# Altium PCB PCB_2-way_Traffic.PcbDoc
Units mil, origin at the board's own origin, x right, y up, seen from the top; angles counter-clockwise.
Board outline 2755.91 x 2244.09 mil, 2 copper layers (Top Layer, Bottom Layer); 24 components, 31 nets, 165 pads, 0 vias.
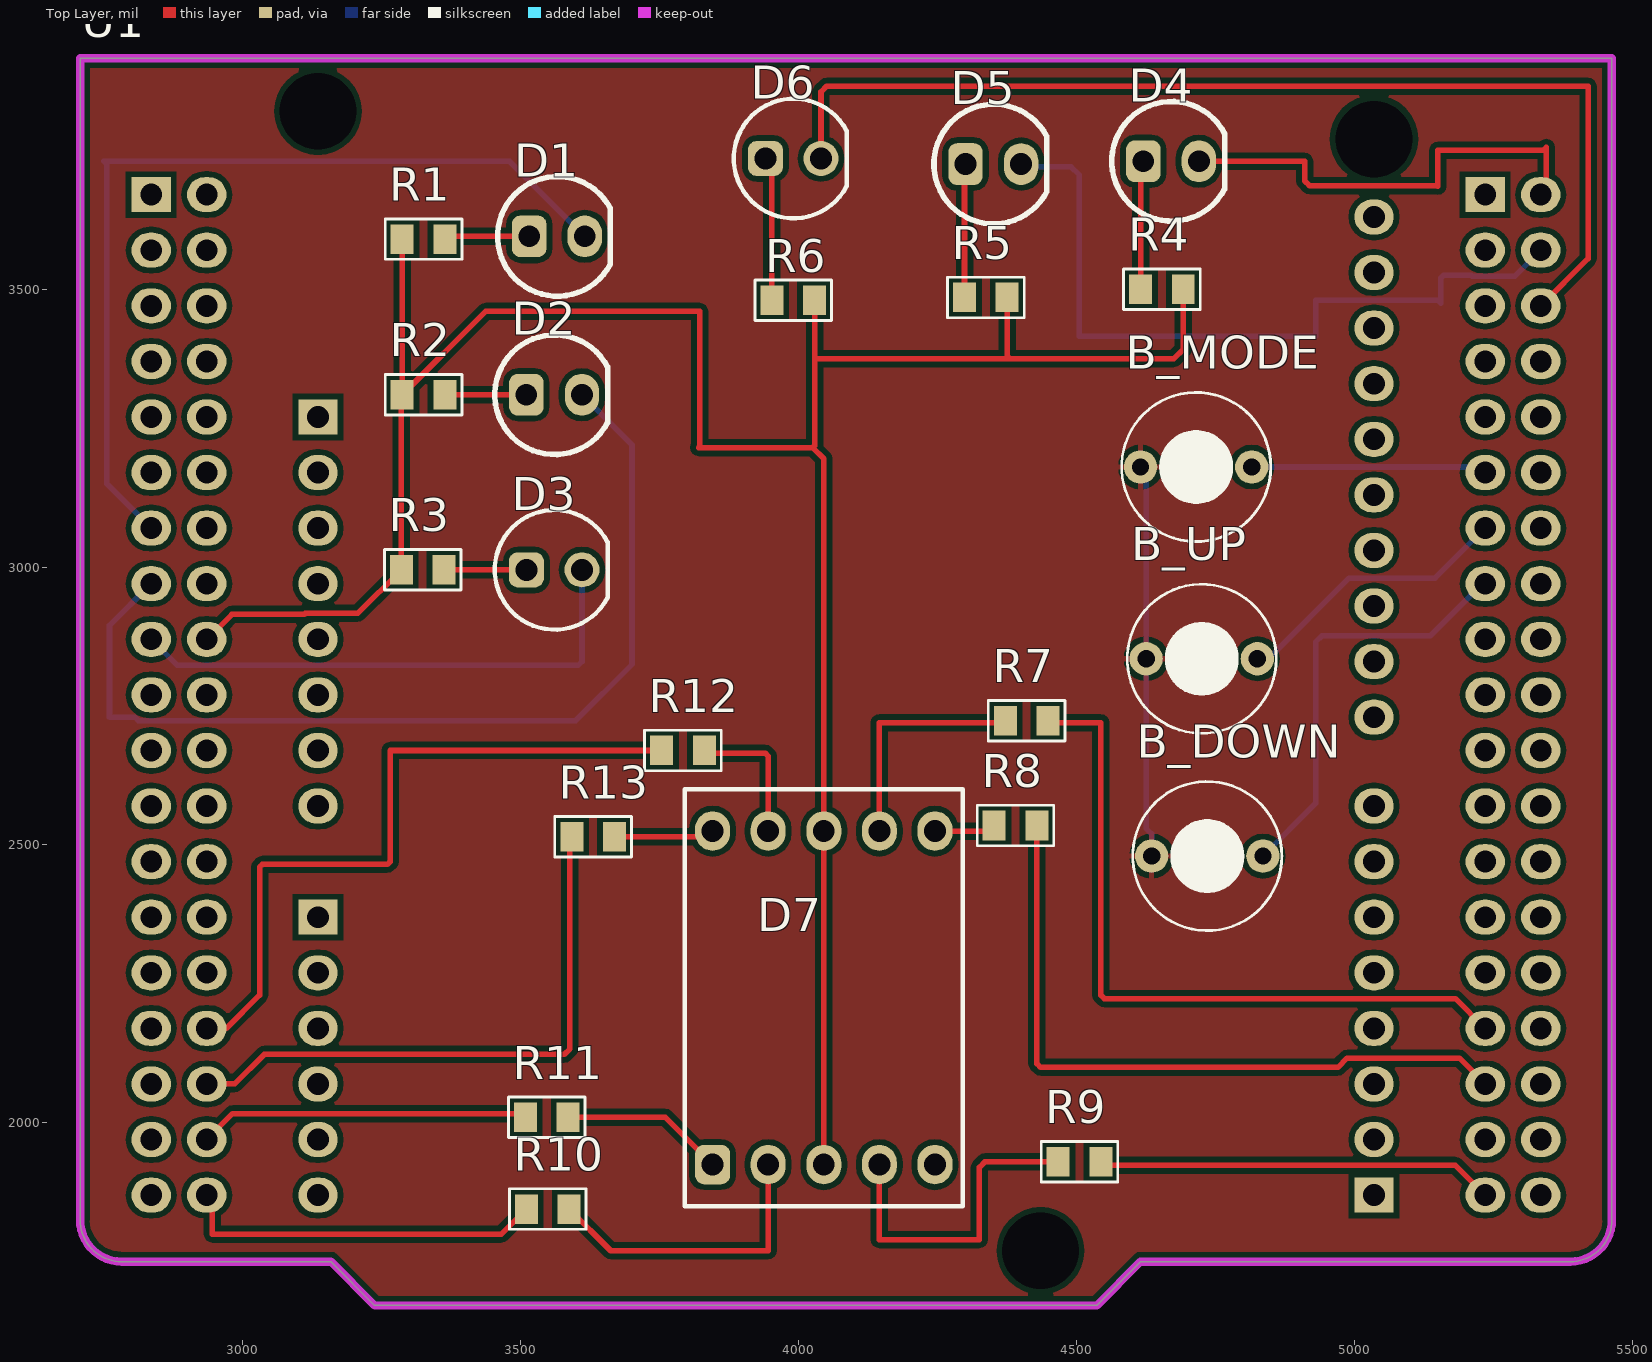
[diagram p0: Top Layer view]
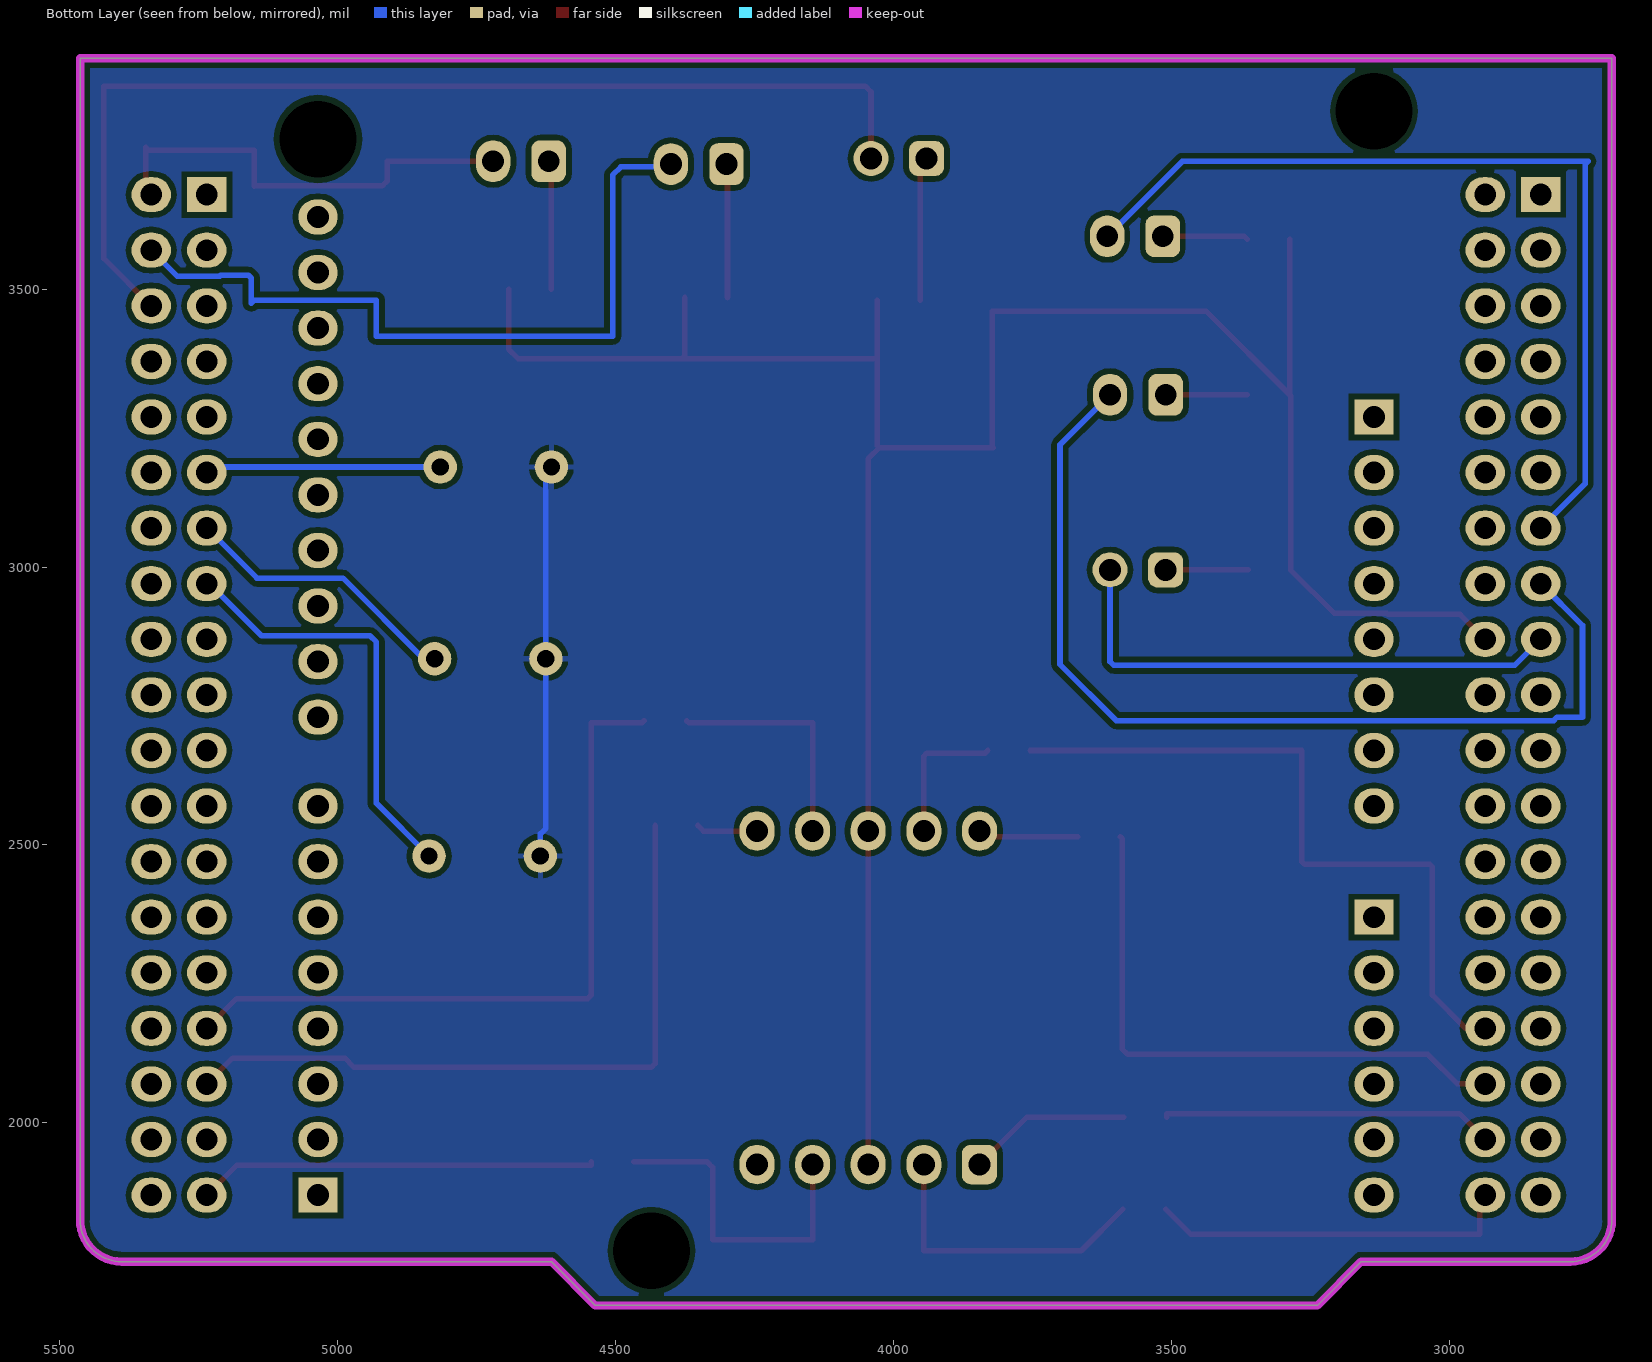
[diagram p1: Bottom Layer view, seen from below]
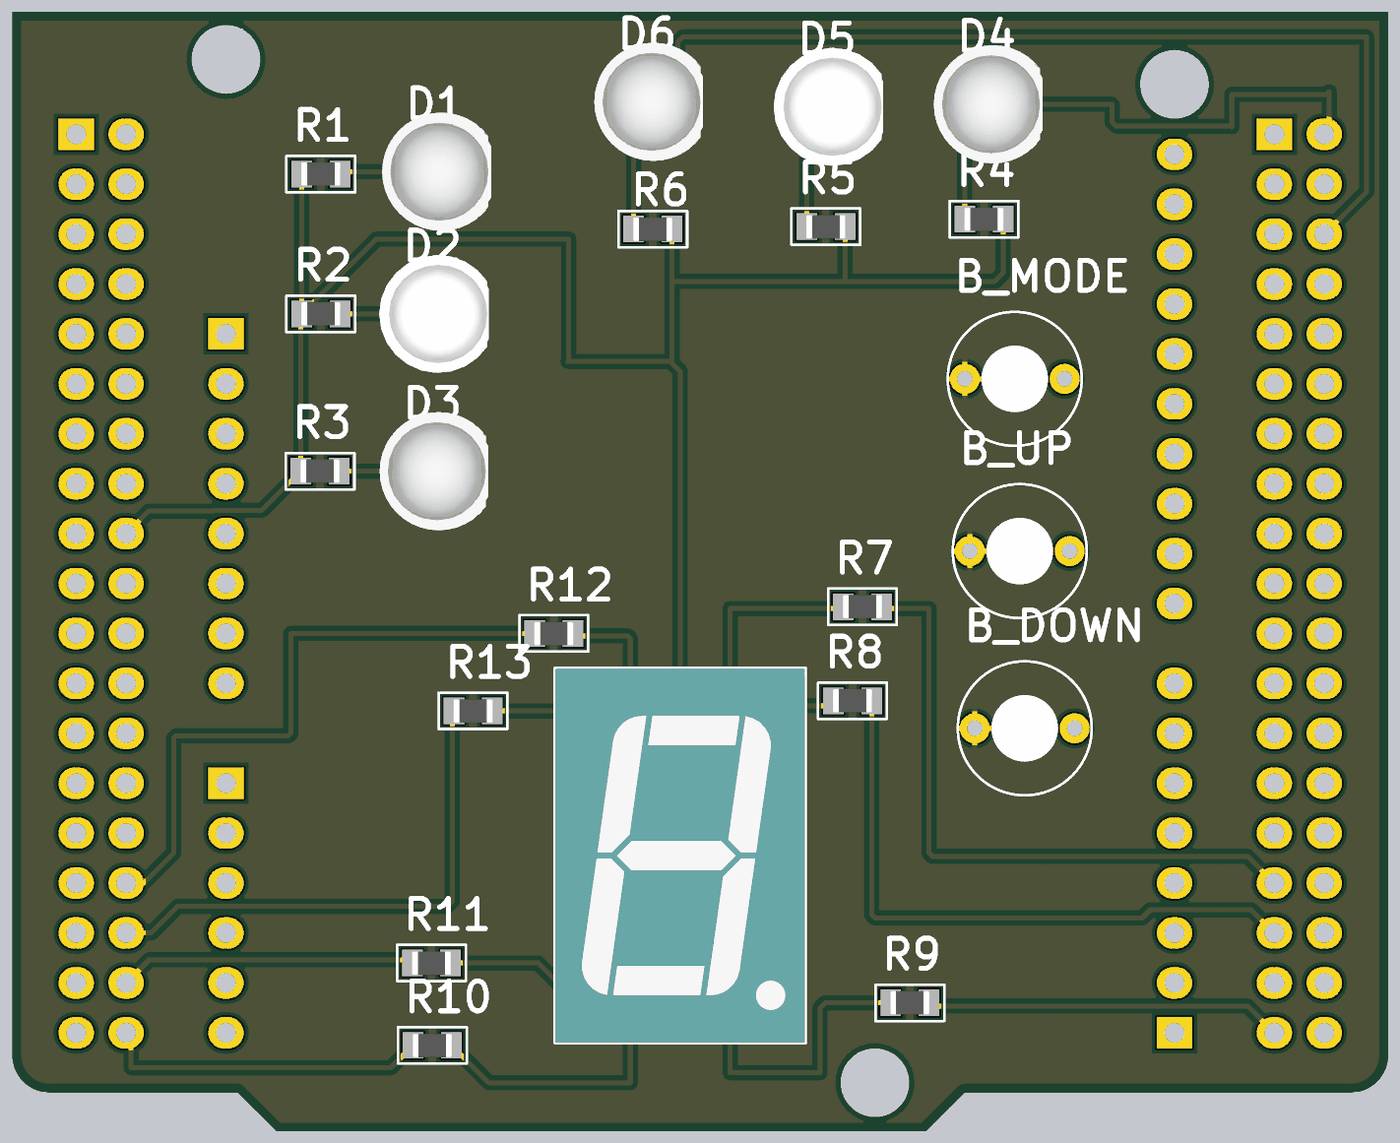
[diagram p2: 3D render of the assembled board from above, using the file's embedded part models]

## Layer stack, top to bottom
Top Solder: solder mask 0.4, Solder Resist, Dk 3.5
Top Layer: signal copper 1.4
Dielectric 1: dielectric 12.6, FR-4, Dk 4.8
Bottom Layer: signal copper 1.4
Bottom Solder: solder mask 0.4, Solder Resist, Dk 3.5

## Board outline
2707.05,1825.32 ccw(c2782.05,1825.32) 2782.05,1750.32 3158.23,1750.32 3236.97,1671.57 4536.18,1671.57 4614.92,1750.32 5387.95,1750.32 ccw(c5387.95,1825.32) 5462.95,1825.32 5462.95,3915.67 2707.05,3915.67

## Design rules (kind name [scope] priority, off if disabled: settings)
Clearance [All] p1: gap=10 ignorepadtopadclearanceinfootprint=FALSE
ComponentClearance [InComponent('U1')] p1: gap=0 collisioncheckmode=3 verticalgap=0 showdistances=FALSE
PolygonConnect [All] p1: connectstyle=Relief reliefconductorwidth=10 reliefentries=4 polygonreliefangle="90 Angle" airgapwidth=10
RoomDefinition SCH_2-way_Traffic [InComponentClass('SCH_2-way_Traffic')] p1: confinementstyle=ConfineIn formatcopy=TRUE lockcomponents=FALSE outline 7045,1060 13045,1060 13045,3945 7045,3945
RoutingVias [All] p1: holewidth=28 width=50 viastyle="Through Hole" minholewidth=28 minwidth=50 maxholewidth=28 maxwidth=50
SolderMaskExpansion [All] p1: expansion=4
Width [All] p1: maxlimit=10 minlimit=10 preferedwidth=10
29 further rules are at their usual default settings.

## Classes and differential pairs
component class SCH_2-way_Traffic: B_DOWN B_MODE B_UP D1 D2 D3 D4 D5 D6 R1 R2 R3 R4 R5 R6 R7 R8 R9 R10 R11 R12 U1

## Components (designator, comment, footprint, x,y, rotation, side; value= is the part's Value field where it differs from the comment)
B_DOWN "Button" SW/2/DIP 4735,2480 r180 top
B_MODE "Button" SW/2/DIP 4715,3180 r180 top
B_UP "Button" SW/2/DIP 4725,2835 r180 top
D1 "Led" "LED 5MM - RED" 3565,3595 r0 top
D2 "Led" "LED 5MM - WHITE" 3560,3310 r0 top
D3 "Led" "LED 5MM - GREEN" 3560,2995 r0 top
D4 "Led" "LED 5MM - RED" 4670,3730 r0 top
D5 "Led" "LED 5MM - WHITE" 4350,3725 r0 top
D6 "Led" "LED 5MM - GREEN" 3990,3735 r0 top
D7 "SM410563N" LED/7SEG/0.56 3845,1925 r0 top
R1 "R" "R 0805" 3325,3590 r180 top
R2 "R" "R 0805" 3325,3310 r180 top
R3 "R" "R 0805" 3323.39,2995 r180 top
R4 "R" "R 0805" 4653.39,3500 r0 top
R5 "R" "R 0805" 4336.61,3485 r0 top
R6 "R" "R 0805" 3990,3480 r0 top
R7 "R" "R 0805" 4410,2723.5 r180 top
R8 "R" "R 0805" 4390,2535 r180 top
R9 "R" "R 0805" 4505,1930 r180 top
R10 "R" "R 0805" 3548.39,1845 r0 top
R11 "R" "R 0805" 3546.61,2010 r0 top
R12 "R" "R 0805" 3791.61,2670 r0 top
R13 "R" "R 0805" 3630,2515 r0 top
U1 "NUCLEO-F103RB" NUCLEO 2707.05,1750.32 r0 top locked

## Footprints (in the part's own frame and the unit in brackets; to place one, negate y for a bottom-side part, rotate by r counter-clockwise, add the part's x,y. Pads: shape width x height; smd on the part's side, far side on the other; paste and mask are expansions set on the pad)
"LED 5MM - GREEN" [mm]
  rrect50% 1.6x1.6 hole 1: 1(-1.27,0)
  round 1.6 hole 1: 2(1.27,0)
  silkscreen extent -2.71,-2.73 2.44,2.73, body extent -2.98,-3.01 2.44,3.01, height 8.63
"LED 5MM - RED" [mil]
  rrect50% 62x75 hole 39: 1(-50,0)
  oval 62x75 hole 39: 2(50,0)
  silkscreen extent -107,-108 96,108, body extent -117,-118 96,119, height 340
"LED 5MM - WHITE" [mil]
  rrect50% 62x75 hole 39: 1(-50,0)
  oval 62x75 hole 39: 2(50,0)
  silkscreen extent -107,-108 96,108, body extent -118,-118 98,118, height 336
LED/7SEG/0.56 [mm]
  rrect50% 1.6x1.8 hole 1: 1(0,0)
  oval 1.6x1.8 hole 1: 2(2.54,0) 3(5.08,0) 4(7.62,0) 5(10.16,0) 6(10.16,15.24) 7(7.62,15.24) 8(5.08,15.24) 9(2.54,15.24) 10(0,15.24)
  silkscreen extent -1.27,-1.91 11.43,17.14, body extent -1.27,-1.91 11.43,17.14, height 8.03
NUCLEO [mm]
  oval 1.8x1.6 hole 1: A5_1(59.13,24.88) A5_2(59.13,27.42) A5_3(59.13,29.96) A5_4(59.13,32.5) A5_5(59.13,35.04) A5_6(59.13,37.58) A5_7(59.13,40.12) A5_8(59.13,42.66) A5_9(59.13,45.2) A5_10(59.13,47.74) A6_2(10.87,36.06) A6_3(10.87,33.52) A6_4(10.87,30.98) A6_5(10.87,28.44) A6_6(10.87,25.9) A6_7(10.87,23.36) A6_8(10.87,20.82) A8_2(10.87,13.2) A8_3(10.87,10.66) A8_4(10.87,8.12) A8_5(10.87,5.58) A8_6(10.87,3.04) A9_2(59.13,5.58) A9_3(59.13,8.12) A9_4(59.13,10.66) A9_5(59.13,13.2) A9_6(59.13,15.74) A9_7(59.13,18.28) A9_8(59.13,20.82) M7_2(5.79,48.76) M7_3(3.25,46.22) M7_4(5.79,46.22) M7_5(3.25,43.68) M7_6(5.79,43.68) M7_7(3.25,41.14) M7_8(5.79,41.14) M7_9(3.25,38.6) M7_10(5.79,38.6) M7_11(3.25,36.06) M7_12(5.79,36.06) M7_13(3.25,33.52) M7_14(5.79,33.52) M7_15(3.25,30.98) M7_16(5.79,30.98) M7_17(3.25,28.44) M7_18(5.79,28.44) M7_19(3.25,25.9) M7_20(5.79,25.9) M7_21(3.25,23.36) M7_22(5.79,23.36) M7_23(3.25,20.82) M7_24(5.79,20.82) M7_25(3.25,18.28) M7_26(5.79,18.28) M7_27(3.25,15.74) M7_28(5.79,15.74) M7_29(3.25,13.2) M7_30(5.79,13.2) M7_31(3.25,10.66) M7_32(5.79,10.66) M7_33(3.25,8.12) M7_34(5.79,8.12) M7_35(3.25,5.58) M7_36(5.79,5.58) M7_37(3.25,3.04) M7_38(5.79,3.04) M10_2(66.75,48.76) M10_3(64.21,46.22) M10_4(66.75,46.22) M10_5(64.21,43.68) M10_6(66.75,43.68) M10_7(64.21,41.14) M10_8(66.75,41.14) M10_9(64.21,38.6) M10_10(66.75,38.6) M10_11(64.21,36.06) M10_12(66.75,36.06) M10_13(64.21,33.52) M10_14(66.75,33.52) M10_15(64.21,30.98) M10_16(66.75,30.98) M10_17(64.21,28.44) M10_18(66.75,28.44) M10_19(64.21,25.9) M10_20(66.75,25.9) M10_21(64.21,23.36) M10_22(66.75,23.36) M10_23(64.21,20.82) M10_24(66.75,20.82) M10_25(64.21,18.28) M10_26(66.75,18.28) M10_27(64.21,15.74) M10_28(66.75,15.74) M10_29(64.21,13.2) M10_30(66.75,13.2) M10_31(64.21,10.66) M10_32(66.75,10.66) M10_33(64.21,8.12) M10_34(66.75,8.12) M10_35(64.21,5.58) M10_36(66.75,5.58) M10_37(64.21,3.04) M10_38(66.75,3.04)
  rect 1.8x1.6 hole 1: A6_1(10.87,38.6) A8_1(10.87,15.74) A9_1(59.13,3.04) M7_1(3.25,48.76) M10_1(64.21,48.76)
  round 0 hole 3.5 unplated: HOLD(10.87,52.57) HOLD(43.89,0.5) HOLD(59.13,51.3)
  Keep-Out Layer lines w0.381: 0,1.905 ccw(c1.905,1.905) 1.905,0 11.46,0 13.46,-2 46.46,-2 48.46,0 68.095,0 ccw(c68.095,1.905) 70,1.905 70,55 0,55 0,1.905
"R 0805" [mm] "Chip Resistor, 2-Leads, Body 2.0x1.3mm, IPC Medium Density"
  rect 1.05x1.35 smd: 1(-0.975,0) 2(0.975,0)
  silkscreen extent -1.75,-0.92 1.75,0.92, body extent -1,-0.61 1,0.59, height 0.5
SW/2/DIP [mil]
  round 60 / inner round 62 / far side round 60 hole 31: 1(-100,0) 2(100,0)
  silkscreen extent -134,-134 134,134, body extent -134,-134 135,135, height 150

## Part data
B_DOWN B_MODE B_UP: library part "SW SPST", "Tact switch 2 pin"
D1 D2 D3 D4 D5 D6: "Typical LED"
D7: library part "LED 7-SEG SM410563N", "SM410563N, Common-Anode, LED 7-seg, RED, 0.56\","
R1 R2 R3 R4 R5 R6 R7 R8 R9 R10 R11 R12 R13: library part Resistor, "Resistor"
U1: "STM32F103RB, mbed-Enabled Development Nucleo-64 STM32F1 ARM® Cortex®-M3 MCU 32-Bit Embedded Evaluation Board", Manufacturer=STMicroelectronics, BRAND=STMicroelectronics, Manufacturer Product Number=NUCLEO-F103RB, PART NO=NUCLEO-F103RB, STOCK CODE=497-14362-ND, SUPPLIER=digi-key, TYPE="EVAL BRD"

## Nets (pads, with @x,y where several pads share a name; then routed paths per layer and width w, separated by ;. In a path a pad name is that pad's centre, name@x,y a point inside that pad or via, vN(x,y) a via of type N, cw(c..) or ccw(c..) an arc to the next point about the centre after c; other vN are vias at no path point)
+5: D7.3 D7.8 R1.2 R2.2 R3.2 R4.2 R5.2 R6.2 U1.M7_18 | length 4501.2
  Top Layer w10: U1.M7_18 2980,2915 3110.31,2915 3111.8,2916.5 3206.5,2916.5 R3.2 3285,3308.39 R2.2 ; R1.2 R2.2 ; R6.2 4028.39,3376.61 ; D7.3 D7.8 4045,3195 4025,3215 ; R5.2 4375,3380 4380,3375 ; R4.2 4691.77,3391.77 4675,3375 4380,3375 ; R2.2 3436.61,3460 3821.61,3460 3821.61,3216.61 3820,3215 4025,3215 ; 4025,3215 4028.39,3218.39 4028.39,3376.61 ; 4028.39,3376.61 4030,3375 4380,3375
GND: B_DOWN.2 B_MODE.2 B_UP.2 | length 708.3
  Bottom Layer w10: B_MODE.2 4625,3170 B_UP.2 4625,2530 4635,2520 B_DOWN.2
LED_GREEN: D3.2 U1.M7_17 | length 962
  Bottom Layer w10: U1.M7_17 2881.5,2823.5 3603.5,2823.5 3610,2830 D3.2
LED_GREEN1: D6.2 U1.M10_6 | length 1934.4
  Top Layer w10: D6.2 4040,3855 4050,3865 5420,3865 5420,3555 U1.M10_6
LED_RED: D1.2 U1.M7_13 | length 1616.1
  Bottom Layer w10: U1.M7_13 2755,3150 2755,3725 2750,3730 3480,3730 D1.2
LED_RED1: D4.2 U1.M10_2 | length 820.4
  Top Layer w10: D4.2 4910,3730 4910,3695 4918.9,3686.1 5148.9,3686.1 5150,3685 5150,3750 5340,3750 5345,3755 5345,3680 U1.M10_2
LED_YELLOW: D2.2 U1.M7_15 | length 1778.2
  Bottom Layer w10: U1.M7_15 2760,2895 2760,2729.84 2805.47,2729.84 2811.8,2723.5 3598.5,2723.5 3700,2825 3700,3220 D2.2
LED_YELLOW1: D5.2 U1.M10_4 | length 1367.3
  Bottom Layer w10: D5.2 4405,3720 4490,3720 4505,3705 4505,3415 4930,3415 4930,3480 5150,3480 5155,3475 5155,3520 5160,3525 5210.31,3525 5211.8,3523.5 5288.5,3523.5 U1.M10_4
NetD1_1: D1.1 R1.1 | length 153.7
  Top Layer w10: R1.1 3368.39,3595 D1.1
NetD2_1: D2.1 R2.1 | length 146.6
  Top Layer w10: R2.1 D2.1
NetD3_1: D3.1 R3.1 | length 148.2
  Top Layer w10: R3.1 D3.1
NetD4_1: D4.1 R4.1 | length 232.1
  Top Layer w10: R4.1 4615,3725 D4.1
NetD5_1: D5.1 R5.1 | length 240.7
  Top Layer w10: R5.1 4298.23,3723.23 D5.1
NetD6_1: D6.1 R6.1 | length 259.8
  Top Layer w10: D6.1 3951.61,3723.39 R6.1
NetD7_1: D7.1 R11.2 | length 295.2
  Top Layer w10: R11.2 3760,2010 D7.1
NetD7_2: D7.2 R10.2 | length 544.3
  Top Layer w10: R10.2 3661.77,1770 3945,1770 D7.2
NetD7_4: D7.4 R9.2 | length 590.8
  Top Layer w10: D7.4 4145,1790 4325,1790 4325,1920 4335,1930 R9.2
NetD7_6: D7.6 R8.2 | length 110.8
  Top Layer w10: D7.6 4341.61,2525 R8.2
NetD7_7: D7.7 R7.2 | length 423.1
  Top Layer w10: D7.7 4145,2720 4368.11,2720 R7.2
NetD7_9: D7.9 R12.2 | length 254.1
  Top Layer w10: R12.2 3835,2665 3940,2665 3945,2660 D7.9
NetD7_10: D7.10 R13.2 | length 180.8
  Top Layer w10: R13.2 3835,2515 D7.10
PA3: R9.1 U1.M10_37 | length 720.3
  Top Layer w10: R9.1 4543.39,1923.5 5181.5,1923.5 U1.M10_37
PA4: R12.1 U1.M7_32 | length 1277.2
  Top Layer w10: U1.M7_32 2970,2170 3030,2230 3030,2460 3035,2465 3260,2465 3265,2470 3265,2670 R12.1
PA5: B_MODE.1 U1.M10_11 | length 424.1
  Bottom Layer w10: B_MODE.1 5225,3180 U1.M10_11
PA6: B_UP.1 U1.M10_13 | length 507.3
  Bottom Layer w10: B_UP.1 4845,2835 4990,2980 5145,2980 U1.M10_13
PA7: B_DOWN.1 U1.M10_15 | length 772.8
  Bottom Layer w10: B_DOWN.1 4930,2575 4930,2865 4941.34,2876.34 5136.34,2876.34 5230,2970 U1.M10_15
PA10: R8.1 U1.M10_33 | length 1263.8
  Top Layer w10: R8.1 4428.39,2106.61 4435,2100 4970,2100 4986.5,2116.5 5188.5,2116.5 U1.M10_33
PB0: R13.1 U1.M7_34 | length 1062.6
  Top Layer w10: U1.M7_34 2985,2070 3038.5,2123.5 3578.5,2123.5 3588.23,2133.23 3588.23,2511.61 R13.1
PB3: R7.1 U1.M10_31 | length 1302.9
  Top Layer w10: R7.1 4451.89,2720 4543.39,2720 4543.39,2230 4549.88,2223.5 5181.5,2223.5 U1.M10_31
PC0: R10.1 U1.M7_38 | length 657.8
  Top Layer w10: U1.M7_38 2945,1860 2945,1800 3465,1800 R10.1
PC1: R11.1 U1.M7_36 | length 599
  Top Layer w10: U1.M7_36 2981.5,2016.5 3508.23,2016.5 R11.1
pads on no net: D7.5 U1.A5_1 U1.A5_2 U1.A5_3 U1.A5_4 U1.A5_5 U1.A5_6 U1.A5_7 U1.A5_8 U1.A5_9 U1.A5_10 U1.A6_1 U1.A6_2 U1.A6_3 U1.A6_4 U1.A6_5 U1.A6_6 U1.A6_7 U1.A6_8 U1.A8_1 U1.A8_2 U1.A8_3 U1.A8_4 U1.A8_5 U1.A8_6 U1.A9_1 U1.A9_2 U1.A9_3 U1.A9_4 U1.A9_5 U1.A9_6 U1.A9_7 U1.A9_8 U1.HOLD U1.M7_1 U1.M7_2 U1.M7_3 U1.M7_4 U1.M7_5 U1.M7_6 U1.M7_7 U1.M7_8 U1.M7_9 U1.M7_10 U1.M7_11 U1.M7_12 U1.M7_14 U1.M7_16 U1.M7_19 U1.M7_20 U1.M7_21 U1.M7_22 U1.M7_23 U1.M7_24 U1.M7_25 U1.M7_26 U1.M7_27 U1.M7_28 U1.M7_29 U1.M7_30 U1.M7_31 U1.M7_33 U1.M7_35 U1.M7_37 U1.M10_1 U1.M10_3 U1.M10_5 U1.M10_7 U1.M10_8 U1.M10_9 U1.M10_10 U1.M10_12 U1.M10_14 U1.M10_16 U1.M10_17 U1.M10_18 U1.M10_19 U1.M10_20 U1.M10_21 U1.M10_22 U1.M10_23 U1.M10_24 U1.M10_25 U1.M10_26 U1.M10_27 U1.M10_28 U1.M10_29 U1.M10_30 U1.M10_32 U1.M10_34 U1.M10_35 U1.M10_36 U1.M10_38

## Polygon pours and split planes (outlines as drawn)
GND on Top Layer "GND_L01_P030" (solid, remove dead copper, pour order 30): 2707.05,3915.67 5462.95,3915.67 5462.95,1792.95 5420.31,1750.32 4614.92,1750.32 4536.18,1671.57 3245,1671.57 3166.26,1750.32 2764.68,1750.32 2707.05,1807.95
GND on Bottom Layer "GND_L02_P032" (solid, remove dead copper, pour order 32): 2707.05,3915.67 5462.95,3915.67 5462.95,1793.27 5420,1750.32 4614.92,1750.32 4614.92,1750.31 4536.18,1671.57 3236.97,1671.57 3158.23,1750.32 2756.73,1750.32 2707.05,1800